# Altium PCB PCB_RP2350zero.pcbdoc (part 1 of 2)
Units mm, origin at the board's own origin, x right, y up, seen from the top; angles counter-clockwise.
Board outline 90.92 x 63.17 mm, 2 copper layers (Top Layer, Bottom Layer); 112 components, 143 nets, 537 pads, 289 vias.
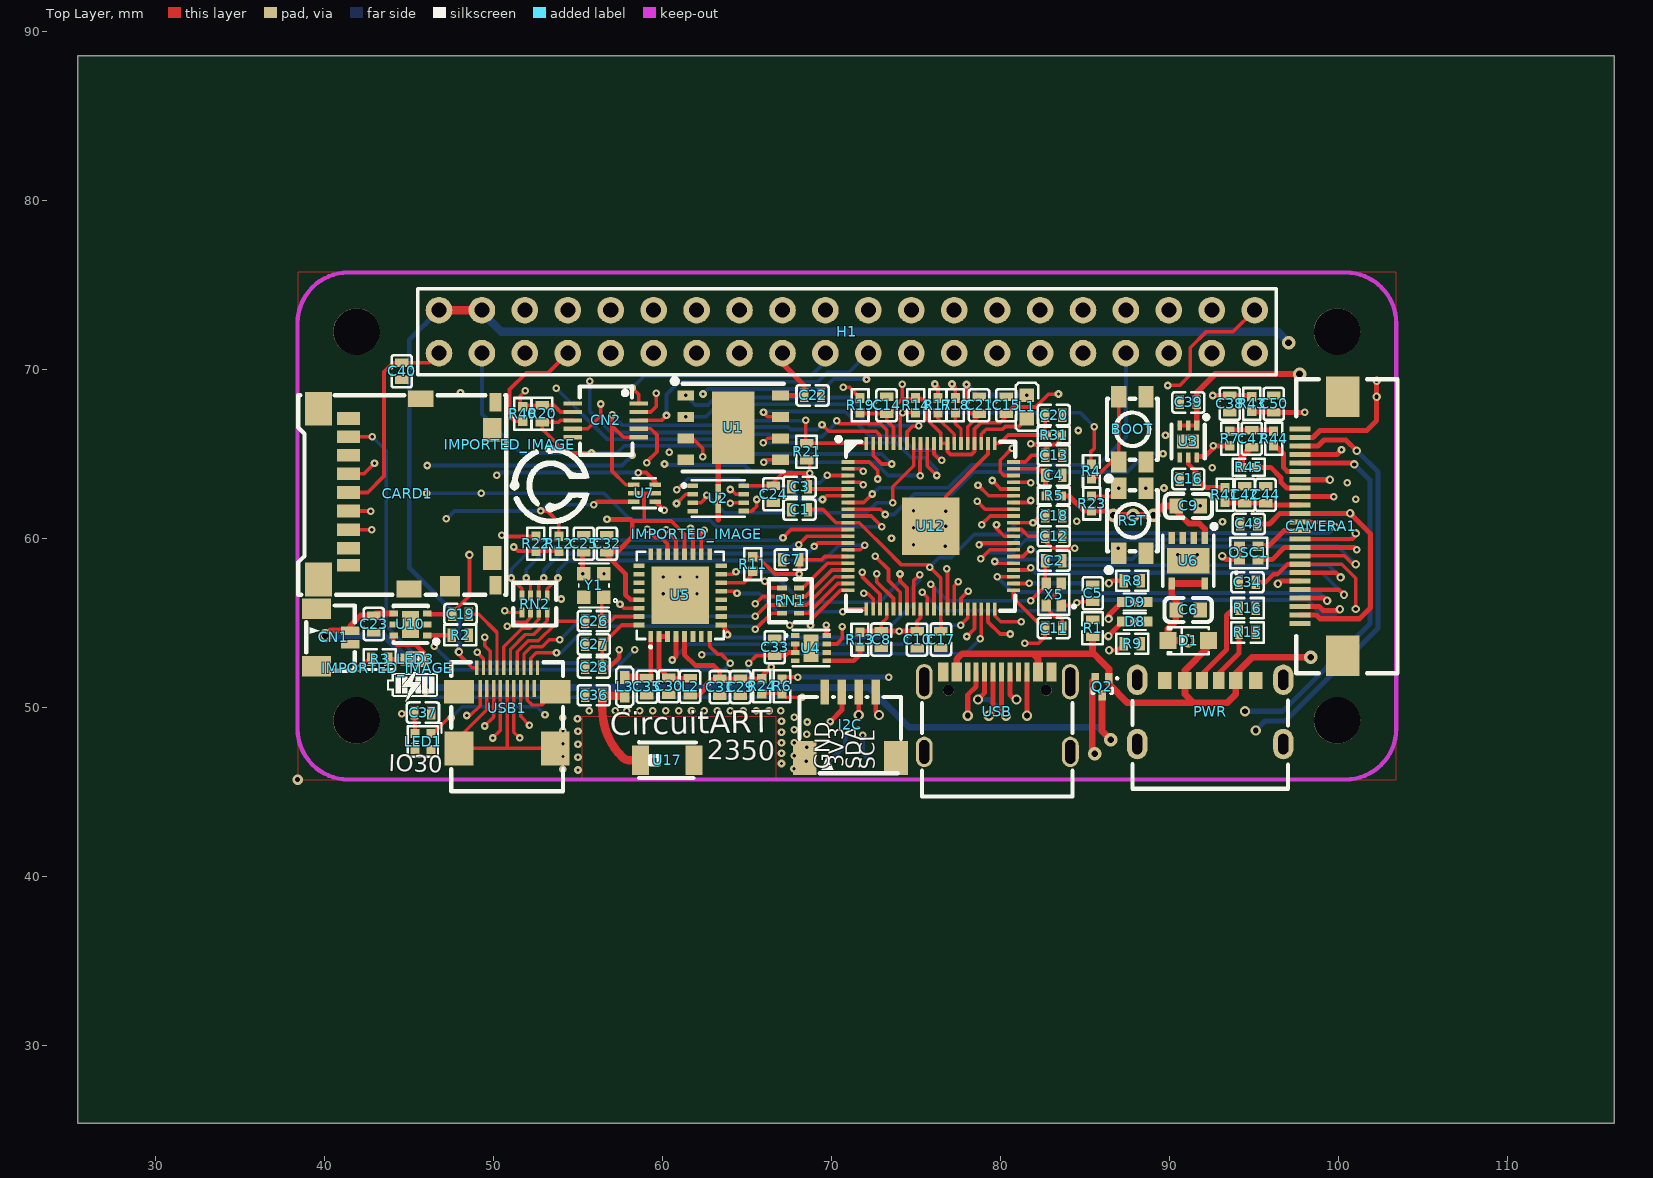
[diagram p0: Top Layer view]
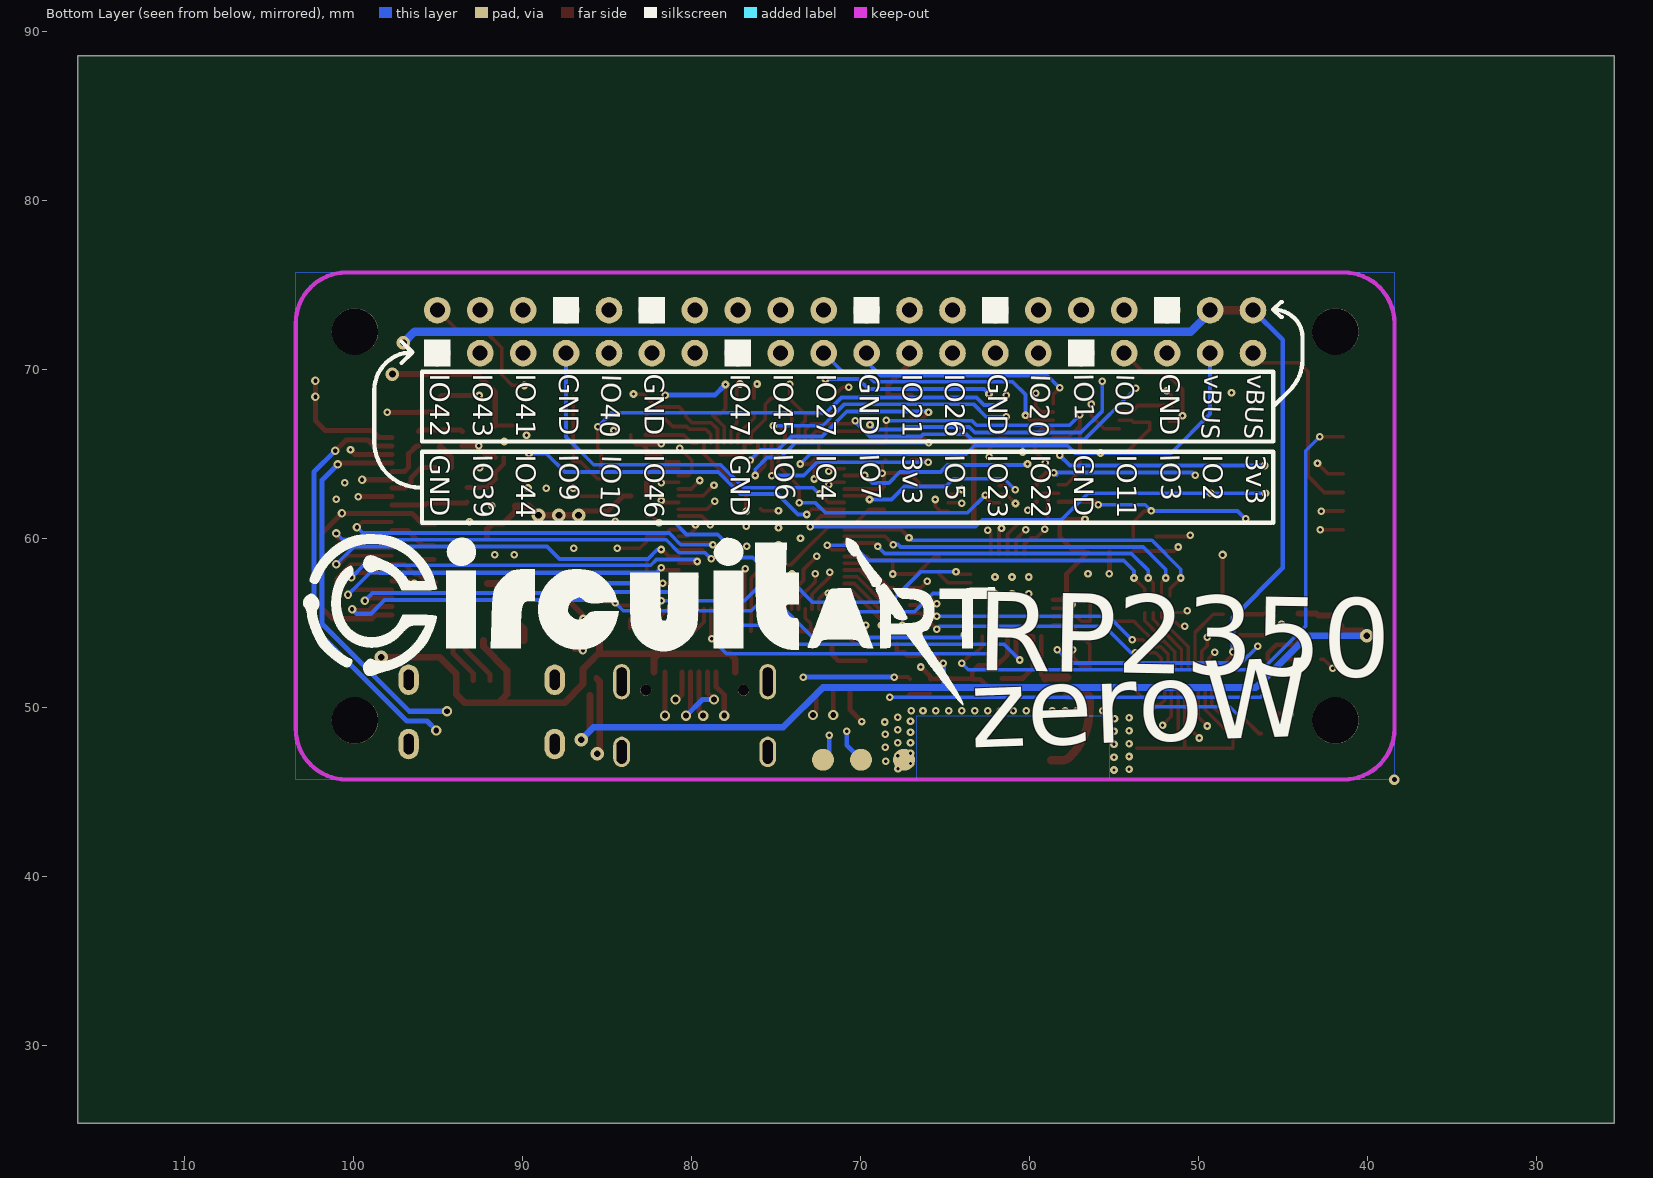
[diagram p1: Bottom Layer view, seen from below]

## Layer stack, top to bottom
Top Layer: signal copper (thickness not stored)
Dielectric: dielectric 0.32, FR-4, Dk 4.8
Bottom Layer: signal copper (thickness not stored)

## Board outline
116.316,25.4 25.4,25.4 25.4,88.572 116.316,88.572

## Components (designator, comment, footprint, x,y, rotation, side; value= is the part's Value field where it differs from the comment)
BOOT "GT-TC034F-H018-L1" SW-SMD_GT-TC034F-H018-L1 87.8,66.465 r90 top
C1 "0.1uF" C0402 68.11,61.715 r0 top
C2 "22P" C0402 83.15,58.695 r0 top
C3 "0.1uF" C0402 68.11,63.065 r0 top
C4 "4.7uF" C0402 83.154,63.737 r180 top
C5 "22P" C0402 85.453,56.765 r90 top
C6 "4.7uF" C0603 91.11,55.775 r0 top
C7 "0.1uF" C0402 67.59,58.755 r0 top
C8 "0.1uF" C0402 72.944,54.027 r90 top
C9 "4.7uF" C0603 91.11,61.935 r180 top
C10 "0.1uF" C0402 75.059,54.025 r90 top
C11 "0.1uF" C0402 83.15,54.705 r180 top
C12 "0.1uF" C0402 83.15,60.135 r180 top
C13 "0.1uF" C0402 83.154,64.937 r180 top
C14 "0.1uF" C0402 73.261,67.885 r270 top
C15 "0.1uF" C0402 80.34,67.885 r270 top
C16 "1uF" C0402 91.11,63.525 r0 top
C17 "0.1uF" C0402 76.474,54.027 r90 top
C18 "0.1uF" C0402 83.154,61.337 r180 top
C19 "10u" C0402 48.05,55.535 r0 top
C20 "4.7uF" C0402 83.154,67.306 r180 top
C21 "10uF" C0402 78.73,67.885 r270 top
C22 "0.1uF" C0402 68.88,68.47 r0 top
C23 "10u" C0402 42.92,54.945 r270 top
C24 "0.1uF" C0402 66.55,62.625 r270 top
C25 "tbd" C0402 55.34,59.695 r90 top
C26 "tbd" C0402 55.94,55.115 r180 top
C27 "10nF" C0402 55.94,53.735 r0 top
C28 "1uF" C0402 55.94,52.375 r0 top
C29 "10u" C0402 64.611,51.215 r270 top
C30 "0.1u" C0402 60.371,51.265 r270 top
C31 "0.1u" C0402 63.391,51.215 r270 top
C32 "0.1u" C0402 56.71,59.695 r90 top
C33 "0.1u" C0402 66.64,53.575 r270 top
C34 "22pF" C0402 94.61,57.415 r180 top
C35 "2.3pf" C0402 59.08,51.235 r90 top
C36 "2.3pf" C0402 55.94,50.735 r0 top
C37 "0.1uF" C0402 45.83,49.705 r0 top
C38 "1uF" C0402 93.56,67.965 r90 top
C39 "1uF" C0402 91.11,68.055 r0 top
C40 "10uF" C0402 44.57,69.895 r270 top
C42 "4.7uF" C0402 94.45,62.595 r90 top
C44 "0.1uF" C0402 95.68,62.585 r90 top
C47 "0.1uF" C0402 94.86,65.915 r270 top
C49 "4.7uF" C0402 94.69,60.865 r180 top
C50 "4.7uF" C0402 96.16,67.965 r90 top
CAMERA1 "FPC0.5-24P" FPC-SMD_P0.50-24P_XJ-FGS 98.989,60.731 r270 top
CARD1 "TF-110" TF-SMD_TF-110 44.887,62.645 r270 top
CN1 "WF08002-01205" CONN-SMD_WF08002-01205 40.53,54.155 r270 top
CN2 "DF23C-10DP-0.5V(92)" CONN-SMD_DF23C-10DP-0.5V92 56.65,66.993 r90 top
D1 "SD103AWS_C777800" SOD-323_L1.8-W1.3-LS2.5-FD 91.11,53.965 r180 top
D8 "LESD5D5.0CT1G" SOD-523_L1.2-W0.8-LS1.6-BI 87.94,55.085 r0 top
D9 "LESD5D5.0CT1G" SOD-523_L1.2-W0.8-LS1.6-BI 87.94,56.244 r0 top
H1 "HDR-F-2.54_2x20" HDR-F-2.54_2X20 70.909,72.245 r0 top
I2C "WF10004-01200" CONN-SMD_4P-P1.00_WF10004-01200 71.113,48.975 r0 top
IMPORTED_IMAGE "IMPORTED_IMAGE" IMPORTED_IMAGE 62.034,60.245 r0 top
IMPORTED_IMAGE "IMPORTED_IMAGE" IMPORTED_IMAGE 43.706,52.338 r0 top
IMPORTED_IMAGE "IMPORTED_IMAGE" IMPORTED_IMAGE 50.967,65.562 r0 top
L1 "3.3UH" L0603 81.56,67.785 r270 top
L2 "2.0NH" L0402#1 61.631,51.235 r90 top
L3 "4.7nH" L0402#2 57.77,51.235 r90 top
LED1 "SK6805-EC15" LED-SMD_4P-L1.5-W1.5-BL 45.83,47.995 r180 top
LED3 "LED 0402" LED_0402 45.36,52.855 r0 top
OSC1 "24MHz" OSC-SMD_4P-L1.6-W1.2-BL 94.69,59.155 r0 top
PWR "TYPE-C-6M-001" USB-C-SMD_918-418K2023S40006 92.411,49.744 r0 top
Q2 "CJ3139K" SOT-723_L1.2-W0.8-P0.40-LS1.2-BR 86.01,51.235 r90 top
R1 "100k" R0402#1 85.443,54.685 r270 top
R2 "2.2k" R0402#1 48.04,54.295 r0 top
R3 "1k" R0402#1 43.27,52.855 r180 top
R4 "2k" R0402#2 85.38,63.975 r90 top
R5 "10R" R0402#2 83.154,62.525 r0 top
R6 "270R" R0402#2 67.07,51.255 r270 top
R7 "0r" R0402#2 93.56,65.915 r90 top
R8 "5.1K" R0402#1 87.8,57.502 r180 top
R9 "5.1K" R0402#1 87.8,53.775 r180 top
R11 "10K" R0402#2 65.343,58.495 r270 top
R12 "1k8" R0402#2 53.87,59.695 r90 top
R13 "10k" R0402#2 71.68,54.027 r90 top
R14 "100K" R0402#2 74.98,67.885 r270 top
R15 "5.1K" R0402#1 94.61,54.445 r180 top
R16 "5.1K" R0402#1 94.61,55.885 r180 top
R17 "27R" R0402#2 76.297,67.885 r90 top
R18 "27R" R0402#2 77.327,67.885 r90 top
R19 "100K" R0402#2 71.69,67.885 r90 top
R20 "10K" R0402#1 52.88,67.375 r270 top
R21 "10K" R0402#1 68.525,65.146 r90 top
R22 "1k8" R0402#2 52.51,59.695 r90 top
R23 "10k" R0402#2 85.39,62.075 r90 top
R24 "1k8" R0402#2 65.87,51.265 r90 top
R31 "27R" R0402#2 83.154,66.126 r0 top
R40 "10k" R0402#2 51.73,67.375 r90 top
R41 "0r" R0402#2 93.28,62.585 r270 top
R43 "0r" R0402#2 94.86,67.965 r270 top
R44 "10K" R0402#2 96.16,65.915 r90 top
R45 "10K" R0402#2 94.69,64.215 r0 top
RN1 "270Ω" RES-ARRAY-SMD_0804-8P-L2.0-W1.0-BL 67.57,56.325 r270 top
RN2 "270Ω" RES-ARRAY-SMD_0804-8P-L2.0-W1.0-BL 52.44,56.125 r0 top
RST "GT-TC034F-H018-L1" SW-SMD_GT-TC034F-H018-L1 87.8,61.055 r90 top
U1 "W25Q128JVPIM" WSON-8_L5.0-W6.0-P1.27-BL-EP 64.18,66.565 r270 top
U2 "APS6404L-3SQR-ZR" USON-8_L3.0-W2.0-P0.50-BL-EP 63.3,62.375 r270 top
U3 "VRD1228MNX" SON-6_L1.8-W1.8-P0.50-LS2.0-BL 91.11,65.745 r180 top
U4 "MAX17048G+T10" DFN-8_L2.0-W2.0-P0.50-BL-EP 68.78,53.515 r270 top
U5 "ESP32-C6FH4" QFN-32_L5.0-W5.0-P0.50-TL-EP3.4 61.05,56.635 r90 top
U6 "AP7361C-33FGE-7" DFN-8_L3.0-W3.0-P0.65-BL-EP 91.11,58.685 r180 top
U7 "TPNTZD5110NT1G" SOT-563-6_L1.6-W1.2-P0.5-LS1.6-BR 58.93,62.685 r0 top
U10 "LP4055QVF" TDFN-6_L2.0-W2.0-P0.65-TL-EP 45.09,54.925 r180 top
U12 "RP2350B" RP2350B_QFN-80 75.864,60.737 r0 top
U17 "2450AT18B100" ANT-SMD_L3.2-W1.6 60.29,46.885 r0 top
USB "TYPE-C16PIN" USB-C-SMD_TYPE-C16PIN 79.81,49.744 r0 top
USB1 "HDMI-101W" HDMI-SMD_HDMI-101W 50.81,49.97 r0 top
X5 "12MHz" OSC-SMD_4P-L2.0-W1.6-BL_R2016XXXXMD4GI 83.15,56.685 r90 top
Y1 "40MHz" OSC-SMD_4P-L2.0-W1.6-BL 55.94,57.225 r90 top

## Footprints (in the part's own frame and the unit in brackets; to place one, negate y for a bottom-side part, rotate by r counter-clockwise, add the part's x,y. Pads: shape width x height; smd on the part's side, far side on the other; paste and mask are expansions set on the pad)
ANT-SMD_L3.2-W1.6 [mm]
  rect 1x1.75 smd paste+0 mask+0.051: 1(-1.578,0) 2(1.578,0)
  silkscreen extent -1.68,-1.05 1.68,1.06
C0402 [mm]
  rect 0.5x0.8 smd paste+0 mask+0.102: 1(-0.5,0) 2(0.5,0)
  silkscreen extent -0.95,-0.6 0.95,0.6
C0603 [mm]
  rect 0.8x0.9 smd paste+0 mask+0.051: 1(-0.7,0) 2(0.7,0)
  silkscreen extent -1.41,-0.71 1.39,0.72
CONN-SMD_4P-P1.00_WF10004-01200 [mm]
  rect 0.5x1.5 smd paste+0 mask+0.051: 1(-1.5,1.95) 2(-0.5,1.95) 3(0.5,1.95) 4(1.5,1.95)
  rect 1.4x2 smd paste+0 mask+0.051: 5(2.7,-1.95) 6(-2.7,-1.95)
  silkscreen extent -3,-2.85 3,1.65
CONN-SMD_DF23C-10DP-0.5V92 [mm]
  rect 0.25x1.1 smd paste+0 mask+0.051: 1(1,-1.95) 2(0.5,-1.95) 3(0,-1.95) 4(-0.5,-1.95) 5(-1,-1.95) 6(-1,1.95) 7(-0.5,1.95) 8(0,1.95) 9(0.5,1.95) 10(1,1.95)
  silkscreen extent -2.03,-1.58 2,1.55
CONN-SMD_WF08002-01205 [mm]
  rect 0.5x1.1 smd paste+0 mask+0.051: 1(-0.4,1) 2(0.4,1)
  rect 1.2x1.7 smd paste+0 mask+0.051: 3(1.7,-1) 4(-1.7,-1)
  silkscreen extent -1.89,-1.6 1.98,1.27
DFN-8_L2.0-W2.0-P0.50-BL-EP [mm]
  rect 0.28x0.505 smd paste+0 mask+0.051: 1(-0.75,-0.928) 2(-0.25,-0.928) 3(0.25,-0.928) 4(0.75,-0.928) 5(0.75,0.928) 6(0.25,0.928) 7(-0.25,0.928) 8(-0.75,0.928)
  rect 1.65x0.9 smd paste+0 mask+0.051: 9(0,0)
  silkscreen extent -1.08,-1.55 1.08,1.08
DFN-8_L3.0-W3.0-P0.65-BL-EP [mm]
  rect 0.4x0.7 smd paste+0 mask+0.102: 1(-0.975,-1.349) 2(-0.325,-1.349) 3(0.325,-1.349) 4(0.975,-1.349) 5(0.975,1.349) 8(-0.975,1.349)
  rect 2.5x1.5 smd paste+0 mask+0.102: 9(0,0)
  silkscreen extent -1.65,-2.16 1.5,1.5
FPC-SMD_P0.50-24P_XJ-FGS [mm]
  rect 0.3x1.25 smd paste+0 mask+0.051: 1(-5.752,-1.262) 2(-5.25,-1.262) 3(-4.75,-1.262) 4(-4.25,-1.262) 5(-3.75,-1.262) 6(-3.25,-1.262) 7(-2.75,-1.262) 8(-2.25,-1.262) 9(-1.75,-1.262) 10(-1.25,-1.262) 11(-0.75,-1.262) 12(-0.25,-1.262) 13(0.25,-1.262) 14(0.75,-1.262) 15(1.25,-1.262) 16(1.75,-1.262) 17(2.25,-1.262) 18(2.75,-1.262) 19(3.25,-1.262) 20(3.75,-1.262) 21(4.25,-1.262) 22(4.75,-1.262) 23(5.25,-1.262) 24(5.75,-1.262)
  rect 2.4x2 smd paste+0 mask+0.051: 25(-7.65,1.262) 26(7.65,1.262)
  silkscreen extent -8.7,-1.5 8.7,4.5
HDMI-SMD_HDMI-101W [mm]
  rect 0.2x0.84 smd paste+0 mask+0.051: 1(1.8,2.385) 3(1.4,2.385) 5(1,2.385) 7(0.6,2.385) 9(0.2,2.385) 11(-0.2,2.385) 13(-0.6,2.385) 15(-1,2.385) 17(-1.4,2.385) 19(-1.8,2.385)
  rect 0.2x1 smd paste+0 mask+0.051: 2(1.6,1.165) 4(1.2,1.165) 6(0.8,1.165) 8(0.4,1.165) 10(0,1.165) 12(-0.4,1.165) 14(-0.8,1.165) 16(-1.2,1.165) 18(-1.6,1.165)
  rect 1.7x2 smd paste+0 mask+0.051: 20(-2.85,-2.385) 20(2.85,-2.385)
  rect 1.8x1.38 smd paste+0 mask+0.051: 20(-2.85,0.975) 20(2.85,0.975)
  silkscreen extent -3.3,-4.91 3.3,2.71
HDR-F-2.54_2X20 [mil]
  round 62 hole 35 paste+0 mask+2: 1(-950,-50) 2(-950,50) 3(-850,-50) 4(-850,50) 5(-750,-50) 6(-750,50) 7(-650,-50) 8(-650,50) 9(-550,-50) 10(-550,50) 11(-450,-50) 12(-450,50) 13(-350,-50) 14(-350,50) 15(-250,-50) 16(-250,50) 17(-150,-50) 18(-150,50) 19(-50,-50) 20(-50,50) 21(50,-50) 22(50,50) 23(150,-50) 24(150,50) 25(250,-50) 26(250,50) 27(350,-50) 28(350,50) 29(450,-50) 30(450,50) 31(550,-50) 32(550,50) 33(650,-50) 34(650,50) 35(750,-50) 36(750,50) 37(850,-50) 38(850,50) 39(950,-50) 40(950,50)
  silkscreen extent -1000,-100 1000,100
IMPORTED_IMAGE [mm]
L0402#1 [mm]
  rect 0.5x0.8 smd paste+0 mask+0.102: 1(-0.5,0) 2(0.5,0)
  silkscreen extent -0.95,-0.6 0.95,0.6
L0402#2 [mm]
  rect 0.79x0.54 smd paste-100 mask+0.051: 1(-0.545,0) 2(0.545,0)
  silkscreen extent -1.17,-0.5 1.17,0.5
L0603 [mm]
  rect 0.8x0.864 smd paste-100 mask+0.051: 1(-0.7,0) 2(0.7,0)
  silkscreen extent -1.42,-0.65 1.41,0.67
LED-SMD_4P-L1.5-W1.5-BL [mm]
  rect 0.55x0.55 smd paste+0 mask+0.051: 1(-0.475,-0.475) 2(0.475,-0.475) 3(0.475,0.475) 4(-0.475,0.475)
  silkscreen extent -1.1,-1.1 0.9,0.9
LED_0402 [mm]
  rect 0.607x0.709 smd paste+0 mask+0.051: 1(-0.556,0) 2(0.556,0)
  silkscreen extent -0.51,-0.41 0.51,0.41
OSC-SMD_4P-L1.6-W1.2-BL [mm]
  rect 0.65x0.55 smd paste+0 mask+0.051: 1(-0.55,-0.4) 2(0.55,-0.4) 3(0.55,0.4) 4(-0.55,0.4)
  silkscreen extent -1.1,-1.23 1.1,0.9
OSC-SMD_4P-L2.0-W1.6-BL [mm]
  rect 0.8x0.8 smd paste+0 mask+0.102: 1(-0.7,-0.6) 2(0.7,-0.6) 3(0.7,0.6) 4(-0.7,0.6)
  silkscreen extent -1.3,-1.37 1.3,0.9
OSC-SMD_4P-L2.0-W1.6-BL_R2016XXXXMD4GI [mm]
  rect 0.7x0.55 smd paste+0 mask+0.051: 1(-0.65,-0.45) 2(0.65,-0.45) 3(0.65,0.45) 4(-0.65,0.45)
  silkscreen extent -1.2,-1.25 1.2,0.92
QFN-32_L5.0-W5.0-P0.50-TL-EP3.4 [mm]
  rect 0.665x0.28 smd paste-100 mask+0.051: 1(-2.432,1.75) 2(-2.432,1.25) 3(-2.432,0.75) 4(-2.432,0.25) 5(-2.432,-0.25) 6(-2.432,-0.75) 7(-2.432,-1.25) 8(-2.432,-1.75) 17(2.432,-1.75) 18(2.432,-1.25) 19(2.432,-0.75) 20(2.432,-0.25) 21(2.432,0.25) 22(2.432,0.75) 23(2.432,1.25) 24(2.432,1.75)
  rect 0.28x0.665 smd paste-100 mask+0.051: 9(-1.75,-2.432) 10(-1.25,-2.432) 11(-0.75,-2.432) 12(-0.25,-2.432) 13(0.25,-2.432) 14(0.75,-2.432) 15(1.25,-2.432) 16(1.75,-2.432) 25(1.75,2.432) 26(1.25,2.432) 27(0.75,2.432) 28(0.25,2.432) 29(-0.25,2.432) 30(-0.75,2.432) 31(-1.25,2.432) 32(-1.75,2.432)
  rect 3.4x3.4 smd paste-100 mask+0.051: 33(0,0)
  silkscreen extent -3.11,-2.58 2.58,2.58
R0402#1 [mm]
  rect 0.5x0.8 smd paste+0 mask+0.102: 1(-0.5,0) 2(0.5,0)
  silkscreen extent -0.95,-0.6 0.95,0.6
R0402#2 [mm]
  rect 0.566x0.54 smd paste-100 mask+0.051: 1(-0.433,0) 2(0.433,0)
  silkscreen extent -0.94,-0.5 0.94,0.5
RES-ARRAY-SMD_0804-8P-L2.0-W1.0-BL [mm]
  rect 0.275x0.6 smd paste+0 mask+0.051: 1(-0.75,-0.5) 2(-0.25,-0.5) 3(0.25,-0.5) 4(0.75,-0.5) 5(0.75,0.5) 6(0.25,0.5) 7(-0.25,0.5) 8(-0.75,0.5)
  silkscreen extent -1.27,-1.27 1.27,1.27
RP2350B_QFN-80 [mm]
  rect 0.78x0.22 smd paste+0 mask+0.051: 1(-4.897,3.8) 2(-4.897,3.4) 3(-4.897,3) 4(-4.897,2.6) 5(-4.897,2.2) 6(-4.897,1.8) 7(-4.897,1.4) 8(-4.897,1) 9(-4.897,0.6) 10(-4.897,0.2) 11(-4.897,-0.2) 12(-4.897,-0.6) 13(-4.897,-1) 14(-4.897,-1.4) 15(-4.897,-1.8) 16(-4.897,-2.2) 17(-4.897,-2.6) 18(-4.897,-3) 19(-4.897,-3.4) 20(-4.897,-3.8) 41(4.897,-3.8) 42(4.897,-3.4) 43(4.897,-3) 44(4.897,-2.6) 45(4.897,-2.2) 46(4.897,-1.8) 47(4.897,-1.4) 48(4.897,-1) 49(4.897,-0.6) 50(4.897,-0.2) 51(4.897,0.2) 52(4.897,0.6) 53(4.897,1) 54(4.897,1.4) 55(4.897,1.8) 56(4.897,2.2) 57(4.897,2.6) 58(4.897,3) 59(4.897,3.4) 60(4.897,3.8)
  rect 0.22x0.78 smd paste+0 mask+0.051: 21(-3.8,-4.897) 22(-3.4,-4.897) 23(-3,-4.897) 24(-2.6,-4.897) 25(-2.2,-4.897) 26(-1.8,-4.897) 27(-1.4,-4.897) 28(-1,-4.897) 29(-0.6,-4.897) 30(-0.2,-4.897) 31(0.2,-4.897) 32(0.6,-4.897) 33(1,-4.897) 34(1.4,-4.897) 35(1.8,-4.897) 36(2.2,-4.897) 37(2.6,-4.897) 38(3,-4.897) 39(3.4,-4.897) 40(3.8,-4.897) 61(3.8,4.897) 62(3.4,4.897) 63(3,4.897) 64(2.6,4.897) 65(2.2,4.897) 66(1.8,4.897) 67(1.4,4.897) 68(1,4.897) 69(0.6,4.897) 70(0.2,4.897) 71(-0.2,4.897) 72(-0.6,4.897) 73(-1,4.897) 74(-1.4,4.897) 75(-1.8,4.897) 76(-2.2,4.897) 77(-2.6,4.897) 78(-3,4.897) 79(-3.4,4.897) 80(-3.8,4.897)
  rect 3.4x3.4 smd paste+0 mask+0.051: 81(0,0)
  silkscreen extent -5.58,-5 5,5.28
SOD-323_L1.8-W1.3-LS2.5-FD [mm]
  rect 1x1 smd paste+0 mask+0.051: 1(-1.2,0) 2(1.2,0)
  silkscreen extent -1.2,-0.8 1.2,0.8
SOD-523_L1.2-W0.8-LS1.6-BI [mm]
  rect 0.6x0.6 smd paste+0 mask+0.051: 1(-0.75,0) 2(0.75,0)
  silkscreen extent -0.65,-0.5 0.65,0.5
SON-6_L1.8-W1.8-P0.50-LS2.0-BL [mm]
  rect 0.35x0.6 smd paste+0 mask+0.051: 1(-0.5,-0.95)
  rect 0.25x0.6 smd paste+0 mask+0.051: 2(0,-0.95) 3(0.5,-0.95) 4(0.5,0.95) 5(0,0.95) 6(-0.5,0.95)
  rect 1.3x0.85 smd paste+0 mask+0.051: 7(0.025,0)
  silkscreen extent -1.18,-1.56 1,1.01
SOT-563-6_L1.6-W1.2-P0.5-LS1.6-BR [mm]
  rect 0.68x0.28 smd paste+0 mask+0.051: 1(0.64,-0.5) 2(0.64,0) 3(0.64,0.5) 4(-0.64,0.5) 5(-0.64,0) 6(-0.64,-0.5)
  silkscreen extent -0.68,-1.02 1.02,0.88
SOT-723_L1.2-W0.8-P0.40-LS1.2-BR [mm]
  rect 0.6x0.45 smd paste+0 mask+0.102: 1(0.5,-0.4) 2(0.5,0.4) 3(-0.5,0)
  silkscreen extent -0.4,-0.94 0.55,0.6
SW-SMD_GT-TC034F-H018-L1 [mm]
  rect 1.25x0.9 smd paste+0 mask+0.051: 1(-1.925,0.8) 2(1.925,0.8) 3(-1.925,-0.8) 4(1.925,-0.8)
  silkscreen extent -3.07,-1.5 1.8,1.55
TDFN-6_L2.0-W2.0-P0.65-TL-EP [mm]
  rect 0.5x0.35 smd paste+0 mask+0.051: 1(-1,0.65) 2(-1,0) 3(-1,-0.65) 4(1,-0.65) 5(1,0) 6(1,0.65)
  rect 1x1.6 smd paste+0 mask+0.051: 7(0,0)
  silkscreen extent -1.65,-1.1 1,1.14
TF-SMD_TF-110 [mm]
  rect 0.75x1.35 smd paste+0 mask+0.051: 1(3.218,-3.455) 2(2.117,-3.455) 3(1.018,-3.455) 4(-0.082,-3.455) 5(-1.182,-3.455) 6(-2.282,-3.455) 7(-3.382,-3.455) 8(-4.462,-3.455) 9(4.218,-3.455)
  rect 1.2x1.2 smd paste+0 mask+0.051: 10(5.465,2.545)
  rect 1.1x0.7 smd paste+0 mask+0.051: 11(5.414,5.23) 14(-5.414,5.23)
  rect 1.4x1.1 smd paste+0 mask+0.051: 12(3.794,5.045) 13(-3.782,5.045)
  rect 1x1.5 smd paste+0 mask+0.051: 15(-5.631,0.82) 18(5.631,0.12)
  rect 2x1.6 smd paste+0 mask+0.051: 16(-5.032,-5.23) 17(5.068,-5.23)
  silkscreen extent -5.84,-6.44 5.97,5.88
USB-C-SMD_918-418K2023S40006 [mm]
  oval 1.2x1.8 hole 0.6 slot 1.2 at 90 deg paste+0 mask+0.051: 1(4.32,1.9) 2(4.32,-1.9) 3(-4.32,-1.9) 4(-4.32,1.9)
  rect 0.7x1 smd paste-100 mask+0.051: A5(-0.5,1.85) B5(0.5,1.85)
  rect 0.8x1 smd paste-100 mask+0.051: A9(1.5,1.85) A12(2.7,1.85) B9(-1.5,1.85) B12(-2.7,1.85)
  silkscreen extent -4.6,-4.55 4.6,0.66
USB-C-SMD_TYPE-C16PIN [mm]
  oval 1x2.1 hole 0.6 slot 1.7 at 90 deg paste+0 mask+0.051: 1(-4.32,1.787) 2(4.32,1.787)
  oval 1x1.8 hole 0.6 slot 1.4 at 90 deg paste+0 mask+0.051: 3(-4.32,-2.362) 4(4.32,-2.362)
  rect 0.6x1.15 smd paste-100 mask+0.051: A1B12(-3.2,2.362) A4B9(-2.4,2.362) B1A12(3.2,2.362) B4A9(2.4,2.362)
  rect 0.3x1.15 smd paste-100 mask+0.051: A5(-1.25,2.362) A6(-0.25,2.362) A7(0.25,2.362) A8(-1.75,2.362) B5(1.75,2.362) B6(0.75,2.362) B7(-0.75,2.362) B8(1.25,2.362)
  round 0.65 hole 0.65 unplated paste+0: ""(-2.89,1.288) ""(2.89,1.288)
  silkscreen extent -4.45,-5 4.45,0.52
USON-8_L3.0-W2.0-P0.50-BL-EP [mm]
  rect 0.28x0.6 smd paste+0 mask+0.051: 1(-0.75,-1.507) 2(-0.25,-1.507) 3(0.25,-1.507) 4(0.75,-1.507) 5(0.75,1.508) 6(0.25,1.508) 7(-0.25,1.508) 8(-0.75,1.508)
  rect 1.7x0.3 smd paste+0 mask+0.051: 9(0,0)
  silkscreen extent -1.08,-2.13 1.08,1.58
WSON-8_L5.0-W6.0-P1.27-BL-EP [mm]
  rect 0.6x1 smd paste+0 mask+0.051: 1(-1.905,-2.8) 2(-0.635,-2.8) 3(0.635,-2.8) 4(1.905,-2.8) 5(1.905,2.8) 6(0.635,2.8) 7(-0.635,2.8) 8(-1.905,2.8)
  rect 4.3x2.5 smd paste+0 mask+0.051: 9(0,0)
  silkscreen extent -2.9,-3.6 2.6,3

## Free pads (board coordinates)
  round 1.3 smd far side paste+0 mask+0.051: 1(67.426,46.916) 1(69.966,46.916) 1(72.22,46.916)
  round 2.75 hole 2.75 unplated paste+0: ""(41.91,49.245) ""(41.91,72.245) ""(99.91,49.245) ""(99.91,72.245)

## Via types
v1: diameter 0.45, hole 0.2, Top Layer to Bottom Layer, tented both sides, 246 vias
v2: diameter 0.5, hole 0.25, Top Layer to Bottom Layer, tented both sides, 22 vias
v3: diameter 0.8, hole 0.4, Top Layer to Bottom Layer, tented both sides, 10 vias
v4: diameter 0.6, hole 0.35, Top Layer to Bottom Layer, tented both sides, 10 vias
v5: diameter 0.62, hole 0.31, Top Layer to Bottom Layer, tented both sides, 1 vias

## Nets (pads, with @x,y where several pads share a name; then routed paths per layer and width w, separated by ;. In a path a pad name is that pad's centre, name@x,y a point inside that pad or via, vN(x,y) a via of type N, cw(c..) or ccw(c..) an arc to the next point about the centre after c; other vN are vias at no path point)
1V1: C1.2 C17.2 C18.2 C21.2 L1.1 U12.10 U12.32 U12.51 U12.65 | length 42.8
  Top Layer w0.22: C1.2@68.61,61.715 69.49,61.715 70.268,60.937 U12.10@70.967,60.937 71.648,60.937 73.444,59.141 73.82,58.765 74.14,58.445 75.262,58.445 75.68,58.445 v1(75.81,58.315) 76.464,57.661 U12.32@76.464,55.84 ; U12.32@76.464,55.84 C17.2@76.474,54.527 ; v1(77.99,69.115) 77.99,67.675 78.28,67.385 C21.2@78.73,67.385 78.73,67.285 78.064,66.619 U12.65@78.064,65.634 ; U12.51@80.761,60.937 v1(81.92,60.937) 82.32,61.337 C18.2@82.654,61.337
  Mid-Layer 1 w0.22: v1(77.99,69.115) 78.1,69.004 78.1,60.744 78.611,60.236 81.219,60.236 v1(81.92,60.937)
  Bottom Layer w0.22: v1(75.81,58.315) 76.369,58.875 77.079,58.875 78.451,60.246 80.29,60.246 80.981,60.937 v1(81.92,60.937)
  Bottom Layer w0.3: v1(77.99,69.115) 78.619,68.485 v1(81.56,68.485)
1V5: C16.2 R41.1 U3.5 | length 3.4
  Top Layer w0.25: U3.5@91.11,64.795 91.11,64.405 91.61,63.905 C16.2@91.61,63.525
  Top Layer w0.3: C16.2@91.61,63.525 92.117,63.018 R41.1@93.28,63.018
2V8: C38.2 R7.1 R43.1 U3.6 | length 7.7
  Top Layer w0.3: U3.6@91.61,64.795 91.66,64.845 92.09,64.845 92.59,65.345 v1(92.59,65.482) R7.1@93.56,65.482 ; v1(92.55,68.465) C38.2@93.56,68.465 94.793,68.465 R43.1@94.86,68.398
  Mid-Layer 1 w0.3: v1(92.55,68.465) 92.55,65.522 v1(92.59,65.482)
3V3: C3.2 C7.2 C8.2 C9.2 C10.2 C11.2 C12.2 C13.2 C14.2 C15.2 C22.1 C24.1 C27.2 C28.2 C29.1 C31.1 C32.1 C37.1 C40.1 C49.1 CAMERA1.11 CAMERA1.23 CARD1.4 CN2.9 H1.1 H1.17 I2C.2 L2.1 LED1.2 OSC1.1 OSC1.4 R3.2 R5.2 R11.1 R13.2 R14.1 R19.1 R20.1 R21.1 R23.1 R24.2 R31.2 R40.2 U1.8 U2.8 U5.5 U5.20 U5.29 U5.32 U6.1 U7.2 U7.5 U12.5 U12.15 U12.24 U12.29 U12.41 U12.50 U12.60 U12.64 U12.68 U12.69 U12.76 | length 145.4
  Top Layer w0.22: CARD1.4@41.432,62.728 42.562,62.728 43.53,63.695 43.53,69.875 44.05,70.395 C40.1@44.57,70.395 46.199,70.395 H1.1@46.779,70.975 ; v1(42.06,52.325) 42.59,52.855 R3.2@42.77,52.855 ; v1(44.57,49.645) 45.27,49.645 C37.1@45.33,49.705 ; C37.1@45.329,49.705 LED1.2@45.355,48.47 ; v1(51.88,68.745) 51.59,68.455 51.59,67.838 51.627,67.875 R20.1@52.88,67.875 53.58,67.875 53.962,67.493 CN2.9@54.7,67.493 ; C28.2@56.44,52.375 56.44,53.735 57.59,54.885 U5.32@58.618,54.885 ; 58.209,61.039 60.517,61.039 61.3,60.255 U5.20@61.3,59.067 ; U7.5@58.29,62.685 U7.2@59.57,62.685 ; 58.908,62.685 58.926,61.039 ; U2.8@64.807,63.125 C24.1@66.55,63.125 ; R11.1@65.343,58.928 65.637,58.928 66.66,57.905 67.71,57.905 v1(68.09,57.905) C7.2@68.09,58.755 69.42,58.755 69.602,58.937 U12.15@70.967,58.937 ; C24.1@66.551,63.124 66.551,63.314 67.109,63.876 v1(68.71,63.875) ; R21.1@68.525,64.646 68.71,64.461 v1(68.71,63.875) 68.61,63.775 C3.2@68.61,63.065 68.738,62.937 U12.5@70.967,62.937 ; R19.1@71.69,67.452 71.757,67.385 C14.2@73.261,67.385 ; C8.2@72.944,54.527 72.944,54.97 73.264,55.289 U12.24@73.264,55.84 ; U12.76@73.664,65.634 73.664,66.591 73.261,66.994 C14.2@73.261,67.385 ; v1(74.193,69.125) 74.193,68.278 ; C10.2@75.059,54.525 75.06,55.115 75.263,55.319 U12.29@75.263,55.839 ; 80.739,67.785 82.08,67.785 82.36,68.064 82.831,68.535 82.92,68.535 ; 80.74,67.785 C15.2@80.34,67.385 80.34,67.225 79.97,66.855 78.84,66.855 78.464,66.479 U12.64@78.464,65.634 78.464,65.159 78.28,64.975 77.04,64.975 76.864,65.151 U12.68@76.864,65.634 U12.69@76.464,65.634 76.464,66.241 75.64,67.065 75.64,67.945 75.29,68.295 R14.1@74.98,68.318 74.94,68.278 74.193,68.278 ; U12.50@80.761,60.537 81.238,60.537 81.64,60.135 C12.2@82.65,60.135 ; U12.60@80.761,64.537 81.46,64.537 81.86,64.937 C13.2@82.654,64.937 82.654,65.329 82.897,65.573 ; U12.41@80.761,56.937 80.762,56.474 82.53,54.706 C11.2@82.65,54.705 82.629,54.186 82.261,53.815 v1(81.43,53.815) ; v1(81.78,65.615) 81.823,65.573 82.897,65.573 ; C12.2@82.65,60.135 82.649,59.835 83.061,59.426 v1(84.4,59.435) ; 82.921,68.534 v1(83.43,68.555) ; R31.2@83.587,66.126 83.586,65.872 83.287,65.573 82.897,65.573 ; C14.2@73.261,67.385 73.3,67.385 74.193,68.278
  Top Layer w0.28: C32.1@56.541,59.195 57.811,57.914 57.811,56.685 58.11,56.385 U5.29@58.618,56.385 ; U5.5@61.3,54.203 61.3,53.135 61.94,52.495 63.014,52.495 63.391,52.118 C31.1@63.391,51.715 ; L2.1@61.631,50.735 62.16,50.735 62.53,51.105 62.53,51.305 62.91,51.685 63.361,51.685 C31.1@63.391,51.715 C29.1@64.611,51.715
  Top Layer w0.285: C28.2@56.44,52.375 56.86,52.375 57.44,52.955 v1(57.44,53.425) ; C32.1@56.71,59.195 56.749,59.235 57.351,59.235 58.209,60.096 58.209,61.039 58.113,61.135 v1(56.72,61.135) ; R24.2@65.87,51.698 65.87,51.845 v1(66.43,52.405) ; v1(69.93,49.175) 70.613,49.858 I2C.2@70.613,50.925 ; C8.2@72.944,54.527 v1(74.002,54.526) C10.2@75.059,54.525
  Top Layer w0.3: C29.1@64.61,51.714 R24.2@65.87,51.698 ; U1.8@66.98,68.47 C22.1@68.38,68.47 ; H1.17@67.099,70.975 67.099,70.355 68.379,69.075 C22.1@68.38,68.47 ; R13.2@71.68,54.46 71.747,54.527 C8.2@72.944,54.527 ; R5.2@83.587,62.525 84.051,62.525 84.933,61.643 R23.1@85.39,61.642 ; R23.1@85.39,61.642 86.423,61.643 v3(86.68,61.385) ; v2(93.12,58.965) 93.33,58.755 OSC1.1@94.14,58.755 OSC1.4@94.14,59.555 ; C49.1@95.19,60.865 95.91,60.865 96.526,61.481 CAMERA1.11@97.727,61.481 ; CAMERA1.23@97.727,55.481 98.674,55.481 98.9,55.255 101.24,55.255 101.88,55.895 101.88,60.298 v2(100.677,61.501) 100.657,61.481 CAMERA1.11@97.727,61.481
  Top Layer w0.35: C9.2@90.41,61.935 90.41,61.625 91.14,60.895 91.76,60.895 92.085,60.57 U6.1@92.085,60.034
  Top Layer w0.4: v3(86.68,61.385) v3(87.84,61.385) v3(89.05,61.385) 89.6,61.935 C9.2@90.41,61.935
  Mid-Layer 1 w0.22: v1(81.78,65.615) 81.781,66.314 83.429,67.965 v1(83.43,68.555)
AVDD_2V8: C50.1 CAMERA1.4 R43.2 | length 8.8
  Top Layer w0.3: R43.2@94.92,67.562 94.987,67.495 C50.1@96.16,67.495 ; C50.1@96.16,67.465 v1(97.99,67.465) ; CAMERA1.4@97.727,64.981 99.905,64.981 v1(100.17,65.245)
  Mid-Layer 1 w0.3: v1(97.99,67.465) 100.17,65.285 v1(100.17,65.245)
BAT: C23.1 C33.2 CN1.1 Q2.3 U4.2 U4.3 U10.4 | length 67
  Top Layer w0.22: v1(65.11,52.625) 65.56,53.075 C33.2@66.64,53.075
  Top Layer w0.285: C33.2@66.64,53.075 67.229,53.076 67.419,53.266 U4.3@67.851,53.266 ; U4.3@67.852,53.265 U4.2@67.852,53.765
  Top Layer w0.35: v3(40.05,54.245) 40.36,54.555 CN1.1@41.53,54.555 ; CN1.1@41.53,54.555 41.529,54.826 42.149,55.446 C23.1@42.92,55.445 ; C23.1@42.92,55.445 43.05,55.575 U10.4@44.09,55.575
  Top Layer w0.4: Q2.3@86.01,50.735 86.01,48.615 v3(86.52,48.105)
  Bottom Layer w0.285: v1(65.11,52.625) 65.073,52.589 65.073,51.195 70.533,51.195
  Bottom Layer w0.4: v3(40.05,54.245) 43.56,54.245 46.61,51.195 72.23,51.195 74.589,48.836 85.789,48.836 v3(86.52,48.105)
BOOTSEL: BOOT.1 BOOT.2 R4.1 | length 5.9
  Top Layer w0.22: R4.1@85.38,63.542 85.567,63.542 86.565,64.54 BOOT.1@87,64.54 BOOT.2@87,68.39
CAM_PWDN: CAMERA1.8 R45.2 | length 3.3
  Top Layer w0.3: R45.2@95.123,64.215 95.743,64.215 95.98,64.215 96.6,63.595 96.6,63.325 96.944,62.981 CAMERA1.8@97.727,62.981
CAM_RESET: CAMERA1.6 R44.1 | length 2.7
  Top Layer w0.3: R44.1@96.16,65.482 96.273,65.482 96.73,65.025 96.73,64.215 96.964,63.981 CAMERA1.6@97.727,63.981
CAMERA1_1: CAMERA1.1
CAMERA1_13: CAMERA1.13 OSC1.3 | length 2.9
  Top Layer w0.3: OSC1.3@95.24,59.555 95.28,59.595 95.9,59.595 96.786,60.481 CAMERA1.13@97.727,60.481
CAMERA1_24: CAMERA1.24
CARD1_1: CARD1.1
CARD1_8: CARD1.8
CARD1_9: CARD1.9
CHRG: LED3.2 U10.6 | length 2.8
  Top Layer w0.27: U10.6@44.09,54.275 44.069,53.944 44.29,53.726 45.41,53.726 45.916,53.218 LED3.2@45.916,52.855
DVDD_1V5: C42.1 C44.1 CAMERA1.10 R41.2 | length 4.5
  Top Layer w0.3: R41.2@93.28,62.152 93.337,62.095 C42.1@94.45,62.095 C44.1@95.68,62.085 ; C44.1@95.68,62.085 95.784,61.981 CAMERA1.10@97.727,61.981
ESP_CS-RP_GPIO21: H1.18 U5.13 U12.21 | length 27
  Top Layer w0.22: U5.13@63.482,56.885 64.28,56.885 v1(64.41,56.755) ; v1(70.66,55.675) 70.825,55.84 U12.21@72.064,55.84
  Mid-Layer 2 w0.22: v1(64.41,56.755) 64.89,57.236 64.89,69.385 65.839,70.335 65.84,71.745 67.099,73.005 H1.18@67.099,73.515
  Bottom Layer w0.22: v1(64.41,56.755) 65.73,56.755 66.81,55.675 v1(70.66,55.675)
ESP_EN-RP_GPIO28: U5.4 U12.36 | length 20.5
  Top Layer w0.22: v1(77.64,54.875) 78.064,55.299 U12.36@78.064,55.84
  Top Layer w0.285: v1(60.58,52.815) 60.8,53.035 U5.4@60.8,54.203
  Bottom Layer w0.22: v1(60.58,52.815) 61.51,53.745 74.18,53.745 75.31,54.875 v1(77.64,54.875)
ESP_HS-RP_GPIO27: H1.22 U5.9 U12.28 | length 34
  Top Layer w0.22: U5.9@63.482,54.885 63.85,54.518 v1(63.85,54.315) ; U12.28@74.864,55.84 74.864,57.518 74.961,57.594 v1(75.22,57.855)
  Mid-Layer 1 w0.22: H1.22@72.179,73.515 73.56,72.134 73.56,65.255 ; 73.561,65.255 74.181,64.635 74.181,63.205 75.72,61.666 75.72,59.344 75.22,58.844 v1(75.22,57.855)
  Bottom Layer w0.22: v1(63.85,54.315) 64.02,54.145 72.83,54.145 74.77,56.085 74.77,57.105 74.94,57.275 75.22,57.555 v1(75.22,57.855)
ESP_RDY-RP_GPIO26: H1.16 U5.15 U12.27 | length 31
  Top Layer w0.22: U5.15@63.482,57.885 64.19,57.885 v1(64.35,58.045) ; v1@74.05,57.905 74.05,57.485 74.464,57.071 U12.27@74.464,55.84
  Mid-Layer 2 w0.22: v1(64.35,58.045) 63.26,59.135 63.26,70.045 63.26,72.216 H1.16@64.559,73.515
  Bottom Layer w0.22: v1(64.35,58.045) 66.42,58.045 67.1,57.365 68.24,56.225 72.82,56.225 74.05,57.455 v1(74.05,57.905)
ESP_RXD-RP_GPIO24: U5.22 U12.25 | length 19.5
  Top Layer w0.22: v1(59.09,60.545) 59.581,60.056 59.929,60.056 60.3,59.685 U5.22@60.3,59.067 ; v1(72.67,57.915) 72.67,57.445 73.664,56.451 U12.25@73.664,55.84
  Mid-Layer 1 w0.22: v1(59.09,60.545) 59.09,60.236 59.23,60.095 59.92,59.405 66.01,59.405 66.909,58.506 72.079,58.506 v1(72.67,57.915)
ESP_TXD-RP_GPIO25: U5.21 U12.26 | length 18.4
  Top Layer w0.22: v1(60.22,60.525) 60.8,59.945 U5.21@60.8,59.067 ; v1(72.59,58.945) 73.37,58.165 73.37,57.515 74.064,56.821 U12.26@74.064,55.84
  Mid-Layer 1 w0.22: v1(60.22,60.525) 60.93,59.815 66.16,59.815 67.03,58.945 v1(72.59,58.945)
GND: BOOT.3 BOOT.4 C1.1 C2.2 C3.1 C4.1 C5.2 C6.2 C7.1 C8.1 C9.1 C10.1 C11.1 C12.1 C13.1 C14.1 C15.1 C16.1 C17.1 C18.1 C19.2 C20.1 C21.1 C22.2 C23.2 C24.2 C25.2 C26.2 C27.1 C28.1 C29.2 C30.2 C31.2 C32.2 C33.1 C34.2 C35.1 C36.1 C37.2 C38.1 C39.1 C40.2 C42.2 C44.2 C47.2 C49.2 C50.2 CAMERA1.2 CAMERA1.15 CAMERA1.25 CAMERA1.26 CARD1.6 CARD1.10 CARD1.11 CARD1.12 CARD1.13 CARD1.14 CARD1.15 CARD1.16 CARD1.17 CARD1.18 CN1.2 CN1.3 CN1.4 CN2.10 D8.2 D9.2 H1.6 H1.9 H1.14 H1.20 H1.25 H1.30 H1.34 H1.39 I2C.1 I2C.5 I2C.6 LED1.4 OSC1.2 pad.1@67.426,46.916 PWR.1 PWR.2 PWR.3 PWR.4 PWR.A12 PWR.B12 R1.1 R2.2 R8.1 R9.1 R15.1 R16.1 R45.1 RST.3 RST.4 U1.4 U1.9 U2.4 U2.9 U3.4 U3.7 U4.1 U4.4 U4.6 U4.9 U5.33 U6.4 U6.9 U10.5 U10.7 U12.62 U12.81 USB1.4 USB1.7 USB1.10 USB1.13 USB1.16 USB1.20 USB.1 USB.2 USB.3 USB.4 USB.A1B12 USB.B1A12 X5.2 X5.4 Y1.2 Y1.4 | length 57.4
  Top Layer w0.2: USB1.20@47.96,47.585 47.96,48.224 49.609,49.875 USB1.16@49.61,51.135 ; USB1.20@47.96,47.585 USB1.20@53.66,47.585 ; C19.2@48.55,55.535 49.121,55.534 50.211,54.445 USB1.13@50.21,52.355 ; USB1.10@50.81,51.135 50.81,47.585 51.514,47.585 ; USB1.7@51.41,52.355 51.41,53.305 52.06,53.955 52.659,53.955 53.62,54.915 53.82,55.115 C26.2@55.44,55.115 ; USB1.4@52.01,51.135 52.009,50.437 52.291,50.155 52.86,50.155 USB1.20@53.66,50.945
  Top Layer w0.22: v1(74.85,61.645) 75.8,61.645 U12.81@75.919,61.764 ; v1(76.77,61.625) 76.77,62.505 79.264,64.999 U12.62@79.264,65.634 ; X5.2@83.6,57.335 83.6,57.075 82.7,56.175 X5.4@82.7,56.035 82.7,55.885 83.23,55.355 83.49,55.355 83.65,55.195 C11.1@83.65,54.705
  Top Layer w0.3: 63.3,61.115 U2.9@63.3,62.375 63.3,65.685 U1.9@64.18,66.565 ; OSC1.2@95.24,58.755 96.07,58.755 96.796,59.481 CAMERA1.15@97.727,59.481 100.934,59.481 v1(101.07,59.345) ; CAMERA1.2@97.727,65.981 98.487,65.981 98.727,66.221 98.901,66.395 101.67,66.395 102.25,66.975 v2(102.25,68.388) v2(102.25,69.335)
  Top Layer w0.4: R45.1@94.257,64.215 94.257,64.813 C47.2@94.86,65.415
  other v1: 55,46.307 54.112,46.345 67.78,46.387 67.04,46.695 68.51,46.82 55,47.069 54.112,47.107 67.8,47.161 67.04,47.305 68.529,47.655 55,47.831 54.112,47.869 67.04,47.915 67.8,47.923 68.529,48.417 67.04,48.535 55,48.593 54.112,48.631 67.8,48.685 68.569,49.147 67.04,49.185 54.97,49.335 54.112,49.393 67.8,49.435 55.66,49.825 57.21,49.825 57.89,49.825 58.652,49.825 59.414,49.825 60.196,49.825 60.958,49.825 61.72,49.825 62.482,49.825 63.244,49.825 64.016,49.825 64.778,49.825 65.54,49.825 66.302,49.825 67.008,49.825 45.09,54.925 54.02,56.425 60.04,56.725 61.04,56.725 62.04,56.725 60.04,57.725 61.04,57.725 62.04,57.725 56.54,57.925 90.49,59.045 91.63,59.045 76.72,59.555 74.85,59.645 73.55,60.025 74.85,60.645 76.77,60.737 93.13,60.995 84.5,61.025 91.81,61.935 101.007,62.321 88.6,62.98 89.67,62.995 92.53,64.185 91.085,65.745 89.76,66.115 84.59,66.395
GPIO0_TX: H1.8 U12.77 | length 27.8
  Top Layer w0.22: v1(70.31,66.965) 70.48,66.795 71.36,66.795 72.9,66.795 73.264,66.431 U12.77@73.264,65.634
  Mid-Layer 1 w0.22: v1(53.71,68.896) 53.17,69.436 53.17,70.007 53.17,72.286 H1.8@54.399,73.515
  Bottom Layer w0.22: v1(53.71,68.896) 56.721,65.885 63.439,65.885 63.729,66.174 66.299,66.174 66.429,66.045 69.459,66.045 70.31,66.896 v1(70.31,66.965)
GPIO1_RX: H1.10 U12.78 | length 25.2
  Top Layer w0.22: v1@69.44,66.745 69.84,66.345 72.63,66.345 72.864,66.111 U12.78@72.864,65.634
  Mid-Layer 1 w0.22: v1@55.69,69.305 55.69,72.265 H1.10@56.939,73.515
  Bottom Layer w0.22: v1@55.69,69.305 55.69,67.556 56.97,66.276 63.241,66.276 63.566,66.601 64.945,66.601 ; 64.946,66.601 67.444,66.601 67.59,66.455 69.16,66.455 v1(69.44,66.735)
  other v1: 55.69,69.305
GPIO2_SDA: CAMERA1.3 CN2.8 H1.3 I2C.3 R20.2 U4.8 U7.1 U12.79 | length 110.8
  Top Layer w0.22: CN2.8@54.7,66.993 53.958,66.993 53.84,66.875 R20.2@52.88,66.875 52.88,66.485 53.18,66.185 54.3,65.065 v1(55.804,65.065) ; U12.79@72.464,65.634 72.464,64.921 72.97,64.415 v1(73.56,64.415)
  Top Layer w0.25: U7.1@59.571,62.187 v1(60.1,61.675)
  Top Layer w0.285: v4(71.613,49.565) I2C.3@71.613,50.925
  Top Layer w0.3: v1(69.7,54.884) U4.8@69.707,54.265 ; CAMERA1.3@97.727,65.481 98.787,65.481 ; 98.788,65.481 99.141,65.834 100.429,65.834 v2(101.08,65.195)
  Mid-Layer 1 w0.22: v1(60.1,61.675) 60.1,63.127 60.709,63.736 60.709,64.894 60.5,65.105 v1(60.39,65.105)
  Mid-Layer 1 w0.285: v1(69.7,54.884) 69.7,51.478 v4(71.613,49.565) ; 89.799,49.205 90.348,48.656 v4(95.1,48.656)
  Mid-Layer 1 w0.3: v4(71.613,49.565) 72.453,48.725 76.59,48.725 77.24,48.075 82.08,48.075 83.209,49.205 89.799,49.205
  Mid-Layer 2 w0.285: v1(69.7,54.884) 69.7,55.885 70.719,56.906 70.719,59.926 72.979,62.184 72.979,62.395 73.56,62.975 v1(73.56,64.415)
  Bottom Layer w0.22: H1.3@49.319,70.975 49.319,67.366 51.62,65.065 v1(55.804,65.065) ; v1(55.804,65.065) 57.31,65.065 57.74,65.495 63.27,65.495 63.759,65.006 64.569,65.006 ; v1(60.39,65.105) 60.399,65.496 ; 64.57,65.005 72.97,65.005 v1(73.56,64.415)
  Bottom Layer w0.3: v4(95.1,48.656) 95.649,49.205 96.84,49.205 102.09,54.455 102.34,54.704 102.34,63.935 v2(101.08,65.195)
GPIO3_SCL: CAMERA1.5 CN2.5 H1.5 I2C.4 R21.2 U4.7 U7.4 U12.80 | length 103.5
  Top Layer w0.22: v1(57.02,67.325) 57.02,66.665 ; U7.4@58.29,63.185 57.83,63.185 57.02,63.995 57.02,66.665 ; CN2.5@58.6,65.993 57.692,65.993 57.02,66.665 ; v1(68.47,67.005) 68.47,65.701 R21.2@68.525,65.646 ; R21.2@68.525,65.646 U12.80@72.064,65.634 ; U4.7@69.707,53.765 70.32,53.765 70.64,54.085 v1(70.64,54.795)
  Top Layer w0.285: I2C.4@72.613,50.925 72.613,49.753 v4(72.81,49.556)
  Top Layer w0.3: CAMERA1.5@97.727,64.481 100.834,64.481 v2(100.93,64.385)
  Mid-Layer 1 w0.285: v1(67.539,54.875) 68.148,55.486 69.97,55.466 v1(70.64,54.795) 70.64,51.726 v4(72.81,49.556) 76.42,49.556 77.41,48.566 78.52,48.566 81.75,48.566 82.1,48.915 ; 82.806,49.621 82.97,49.786 v4(94.473,49.786)
  Mid-Layer 1 w0.3: 82.1,48.915 82.97,49.785
  Mid-Layer 2 w0.285: v1(67.539,54.875) 67.539,55.354 69.74,57.555 69.74,60.725 68.04,62.425 68.04,66.575 v1(68.47,67.005)
  Mid-Layer 2 w0.3: H1.5@51.859,70.975 51.859,69.644 54.181,67.325 v1(57.02,67.325)
  Bottom Layer w0.22: v1(57.02,67.325) 57.64,66.705 58.775,66.705 ; 58.56,66.705 62.339,66.705 63.13,66.705 63.4,66.975 68.44,66.975 v1(68.47,67.005)
  Bottom Layer w0.3: v4(94.473,49.786) 96.69,49.786 101.849,54.945 101.849,63.137 101.849,63.466 v2(100.93,64.385)
GPIO4_MISO: CARD1.7 CN2.3 H1.21 U5.8 U12.1 | length 80.9
  Top Layer w0.22: CARD1.7@41.432,66.028 v1(42.83,66.027) ; CN2.3@58.6,66.993 59.948,66.993 v1(60.24,67.285) ; U5.8@62.8,54.203 62.799,53.614 63.251,53.165 63.471,53.165 v1(64.01,52.625) ; U12.1@70.967,64.537 72.228,64.537 72.73,64.035 v1(72.73,63.525)
  Mid-Layer 1 w0.3: H1.21@72.179,70.975 72.73,70.424 v1(72.73,63.525)
  Mid-Layer 2 w0.22: v1(42.83,66.027) 42.998,66.195 59.34,66.195 60.24,67.095 v1(60.24,67.285)
  Bottom Layer w0.22: v1(42.83,66.027) 43.66,65.197 43.66,54.826 46.261,52.225 63.63,52.245 v1(64.01,52.625) ; v1@60.239,67.284 60.239,68.516 61.001,69.276 69.2,69.276 69.761,69.835 71.039,69.835 H1.21@72.179,70.975
GPIO5_TFCS: CN2.7 H1.15 U12.2 | length 28.9
  Top Layer w0.22: CN2.7@54.7,66.493 55.582,66.493 56.35,67.261 v1@56.35,68.015 ; U12.2@70.967,64.137 71.718,64.137 v1(71.87,63.985)
  Mid-Layer 1 w0.22: v1(62.4,68.555) 62.4,68.816 H1.15@64.559,70.975 ; v1(71.87,63.985) 72.07,64.185 v1(72.07,69.415)
  Mid-Layer 2 w0.22: v1(56.35,67.965) 61.81,67.965 v1(62.4,68.555)
  Bottom Layer w0.22: v1(62.4,68.555) 62.69,68.844 69.528,68.844 70.13,69.446 72.04,69.446 v1(72.07,69.415)